# Altium PCB aircraftv2.PcbDoc
Units mil, origin at the board's own origin, x right, y up, seen from the top; angles counter-clockwise.
Board outline 6000 x 4000 mil, 2 copper layers (Top Layer, Bottom Layer); 58 components, 44 nets, 226 pads, 0 vias.
Unrouted connection lines stored in the file: 145.
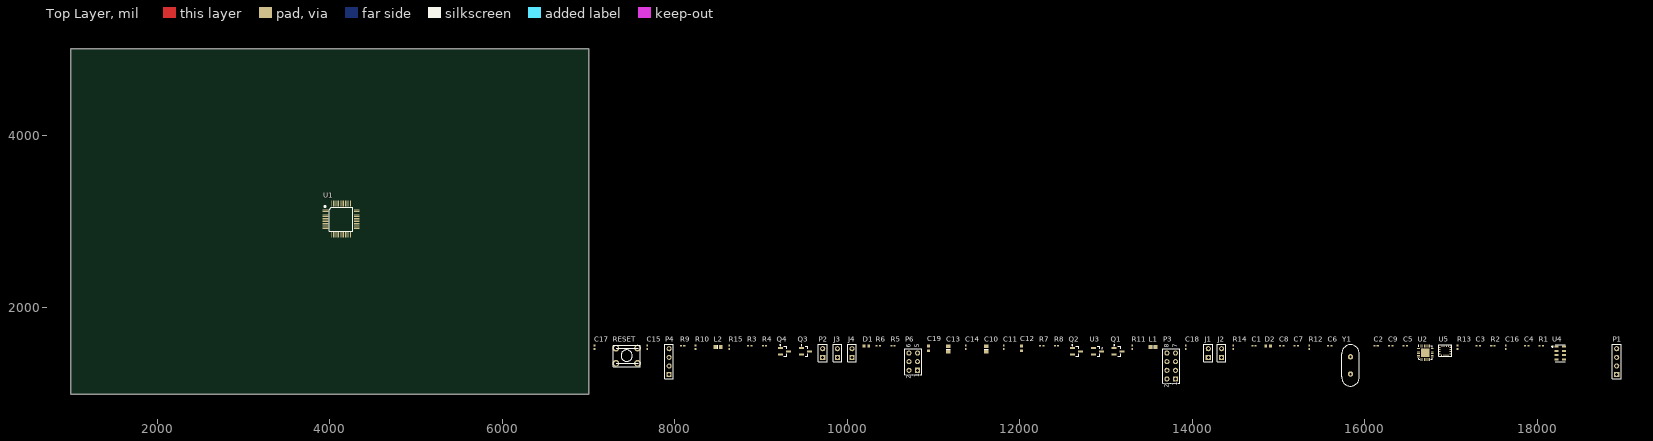
[diagram p0: Top Layer view]
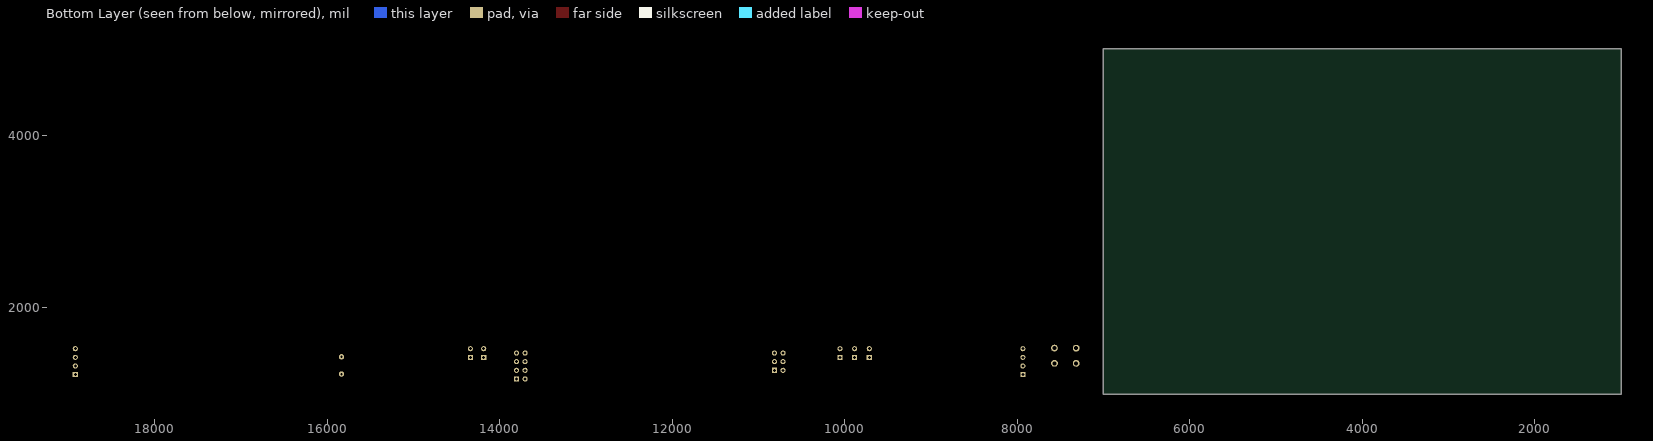
[diagram p1: Bottom Layer view, seen from below]

## Layer stack, top to bottom
Top Layer: signal copper 1.4
Dielectric: dielectric 12.6, FR-4, Dk 4.8
Bottom Layer: signal copper 1.4

## Board outline
1000,1000 7000,1000 7000,5000 1000,5000

## Design rules (kind name [scope] priority, off if disabled: settings)
Clearance [All] p1: gap=10
PolygonConnect [All] p1: connectstyle=Relief reliefconductorwidth=10 reliefentries=4 polygonreliefangle="90 Angle"
RoomDefinition aircraft [InComponentClass('aircraft')] p1: confinementstyle=ConfineIn formatcopy=TRUE lockcomponents=FALSE outline 7045,1060 18980,1060 18980,1685 7045,1685
RoutingVias [All] p1: holewidth=28 width=50 viastyle="Through Hole" minholewidth=28 minwidth=50 maxholewidth=28 maxwidth=50
SilkscreenOverComponentPads [All] p1: minsilkscreentomaskgap=10
SolderMaskExpansion [All] p1: expansion=4
Width [All] p1: maxlimit=10 minlimit=10 preferedwidth=10
27 further rules are at their usual default settings.

## Components (designator, comment, footprint, x,y, rotation, side; value= is the part's Value field where it differs from the comment)
C1 "Cap" 0402 14715,1560 r0 top
C2 "Cap" 0402 16130,1560 r0 top
C3 "Cap" 0402 17315,1560 r0 top
C4 "Cap" 0402 17875,1560 r0 top
C5 "Cap" 0402 16470,1560 r0 top
C6 "Cap" 0402 15595,1560 r0 top
C7 "Cap" 0402 15205,1560 r0 top
C8 "Cap" 0402 15035,1560 r0 top
C9 "Cap" 0402 16300,1560 r0 top
C10 "Cap" 6-0805_L 11610,1520 r90 top
C11 "Cap" 0402 11815,1540 r90 top
C12 "Cap" 1608[0603] 12020,1530 r90 top
C13 "Cap" 6-0805_L 11170,1520 r90 top
C14 "Cap" 0402 11375,1540 r90 top
C15 "Cap" 0402 7680,1540 r90 top
C16 "Cap" 0402 17635,1540 r90 top
C17 "Cap" 0402 7070,1540 r90 top
C18 "Cap" 0402 13925,1540 r90 top
C19 "Cap" 1608[0603] 10940,1530 r90 top
D1 "LED0" 1608[0603] 10220,1555 r0 top
D2 "LED0" 1608[0603] 14880,1555 r0 top
J1 "Header 2" HDR1X2 14185,1425 r90 top
J2 "Header 2" HDR1X2 14340,1425 r90 top
J3 "Header 2" HDR1X2 9885,1425 r90 top
J4 "Header 2" HDR1X2 10055,1425 r90 top
L1 "Inductor" 6-0805_L 13545,1545 r0 top
L2 "Inductor" 6-0805_L 8500,1545 r0 top
P1 "Header 4" HDR1X4 18920,1225 r90 top
P2 "Header 2" HDR1X2 9715,1425 r90 top
P3 "Header 4X2" HDR2X4 13805,1175 r90 top
P4 "Header 4" HDR1X4 7935,1225 r90 top
P6 "Header 3X2" HDR2X3 10815,1275 r90 top
Q1 "SI2302" SOT-23_M 13140,1495 r0 top
Q2 "SI2302" SOT-23_M 12655,1495 r0 top
Q3 "SI2302" SOT-23_M 9515,1495 r0 top
Q4 "SI2302" SOT-23_M 9270,1495 r0 top
R1 "Res3" 0402 18045,1560 r0 top
R2 "Res3" 0402 17485,1560 r0 top
R3 "Res3" 0402 8870,1560 r0 top
R4 "Res3" 0402 9040,1560 r0 top
R5 "Res3" 0402 10530,1560 r0 top
R6 "Res3" 0402 10360,1560 r0 top
R7 "Res3" 0402 12255,1560 r0 top
R8 "Res3" 0402 12425,1560 r0 top
R9 "Res3" 0402 8090,1560 r0 top
R10 "Res3" 0402 8240,1540 r90 top
R11 "Res3" 0402 13305,1540 r90 top
R12 "Res3" 0402 15355,1540 r90 top
R13 "Res3" 0402 17075,1540 r90 top
R14 "Res3" 0402 14475,1540 r90 top
R15 "Res3" 0402 8630,1540 r90 top
RESET "SW-PB" SW2 7445,1415 r0 top
U1 "STM32F103" LQFP48S 3950,3135 r0 top
U2 "MPU6050" QFN24 16780,1470 r0 top
U3 "ME6206A" SOT23_M 12900,1495 r0 top
U4 "MS5611" "MS5611 - duplicate" 18265,1475 r0 top
U5 "HWC5883L" HMC5883L 16935,1505 r0 top
Y1 "XTAL" XTAL2 15840,1340 r90 top

## Footprints (in the part's own frame and the unit in brackets; to place one, negate y for a bottom-side part, rotate by r counter-clockwise, add the part's x,y. Pads: shape width x height; smd on the part's side, far side on the other; paste and mask are expansions set on the pad)
6-0805_L [mm] "Chip Resistor, Body 2.0x1.2mm, IPC High Density"
  rect 1x1.3 smd: 1(-0.8,0) 2(0.8,0)
  silkscreen extent 0,-0.55 0,0.55, body extent -1.07,-0.7 1.07,0.7, height 0.7
0402 [mm] "Chip Capacitor, Body 1.0x0.5mm, IPC High Density"
  rect 0.6x0.5 smd: 1(-0.5,0) 2(0.5,0)
  body extent -0.55,-0.3 0.55,0.3, height 1.3
1608[0603] [mm] "Chip Capacitor, Body 1.6x0.8mm, IPC High Density"
  rect 0.8x0.9 smd: 1(-0.7,0) 2(0.7,0)
  body extent -0.87,-0.48 0.87,0.48, height 1.3
HDR1X2 [mm] "Connector; Header; 2 Position"
  rect 1.5x1.5 hole 0.9: 1(0,0)
  round 1.5 hole 0.9: 2(2.54,0)
  silkscreen extent -1.27,-1.27 3.81,1.27
HDR1X4 [mm] "Connector; Header; 4 Position"
  rect 1.5x1.5 hole 0.9: 1(0,0)
  round 1.5 hole 0.9: 2(2.54,0) 3(5.08,0) 4(7.62,0)
  silkscreen extent -1.27,-1.27 8.89,1.27
HDR2X3 [mm] "Connector; Header; 3x2 Position"
  rect 1.5x1.5 hole 0.9: 1(0,0)
  round 1.5 hole 0.9: 2(0,2.54) 3(2.54,0) 4(2.54,2.54) 5(5.08,0) 6(5.08,2.54)
  silkscreen extent -1.27,-1.27 6.35,3.81
HDR2X4 [mm] "Connector; Header; 4x2 Position"
  rect 1.5x1.5 hole 0.9: 1(0,0)
  round 1.5 hole 0.9: 2(0,2.54) 3(2.54,0) 4(2.54,2.54) 5(5.08,0) 6(5.08,2.54) 7(7.62,0) 8(7.62,2.54)
  silkscreen extent -1.27,-1.27 8.89,3.81
HMC5883L [mm]
  rect 0.45x0.3 smd: 1(1.397,0.889) 2(1.397,0.254) 3(1.397,-0.381) 4(1.397,-1.016) 9(-1.651,-1.016) 10(-1.651,-0.381) 11(-1.651,0.254) 12(-1.651,0.889)
  rect 0.3x0.45 smd: 5(0.762,-1.397) 6(0.127,-1.397) 7(-0.508,-1.397) 8(-1.143,-1.397) 13(-1.016,1.27) 14(-0.381,1.27) 15(0.254,1.27) 16(0.889,1.27)
  silkscreen extent -2.03,-1.78 1.78,1.65
LQFP48S [mil] "DPIN-0.5"
  rect 65x10 smd: 1(0.42,0.29) 2(0.42,-19.39) 3(0.42,-39.08) 4(0.42,-58.76) 5(0.42,-78.45) 6(0.42,-98.13) 7(0.42,-117.82) 8(0.42,-137.5) 9(0.42,-157.19) 10(0.42,-176.87) 11(0.42,-196.56) 12(0.42,-216.24) 25(362.63,-216.24) 26(362.63,-196.56) 27(362.63,-176.87) 28(362.63,-157.19) 29(362.63,-137.5) 30(362.63,-117.82) 31(362.63,-98.13) 32(362.63,-78.45) 33(362.63,-58.76) 34(362.63,-39.08) 35(362.63,-19.39) 36(362.63,0.29)
  rect 10x65 smd: 13(73.26,-289.08) 14(92.94,-289.08) 15(112.63,-289.08) 16(132.31,-289.08) 17(152,-289.08) 18(171.68,-289.08) 19(191.37,-289.08) 20(211.05,-289.08) 21(230.74,-289.08) 22(250.42,-289.08) 23(270.11,-289.08) 24(289.79,-289.08) 37(289.79,73.13) 38(270.11,73.13) 39(250.42,73.13) 40(230.74,73.13) 41(211.05,73.13) 42(191.37,73.13) 43(171.68,73.13) 44(152,73.13) 45(132.31,73.13) 46(112.63,73.13) 47(92.94,73.13) 48(73.26,73.13)
  silkscreen extent -10,-246 319,46
"MS5611 - duplicate" [mm]
  rect 1.1x0.6 smd: 1(-1.1,1.875) 2(-1.1,0.625) 3(-1.1,-0.625) 4(-1.1,-1.875) 5(1.1,-1.875) 6(1.1,-0.625) 7(1.1,0.625) 8(1.1,1.875)
  silkscreen extent -2.41,-2.5 1.5,2.5
QFN24 [mm] "QFN24"
  rect 0.8x0.25 smd: 1(-4,1.45) 2(-4,0.95) 3(-4,0.45) 4(-4,-0.05) 5(-4,-0.55) 6(-4,-1.05) 13(0,-1.05) 14(0,-0.55) 15(0,-0.05) 16(0,0.45) 17(0,0.95) 18(0,1.45)
  rect 0.25x0.8 smd: 7(-3.25,-1.8) 8(-2.75,-1.8) 9(-2.25,-1.8) 10(-1.75,-1.8) 11(-1.25,-1.8) 12(-0.75,-1.8) 19(-0.75,2.2) 20(-1.25,2.2) 21(-1.75,2.2) 22(-2.25,2.2) 23(-2.75,2.2) 24(-3.25,2.2)
  rect 2.5x2.5 smd: 25(-2,0.2)
  silkscreen extent -4.11,-1.75 0.05,2.36
SOT23_M [mm] "SOT23, 3-Leads, Body 2.9x1.3mm, Pitch 0.95mm, Lead Span 2.3mm - Reverse Pinning, IPC Low Density"
  rect 1.45x0.6 smd: 1(1.175,0) 2(-1.175,-0.95) 3(-1.175,0.95)
  silkscreen extent -0.1,-1.5 1.48,1.5, body extent -0.7,-1.5 0.7,1.5, height 1.1
SOT-23_M [mm] "SOT23, 3-Leads, Body 2.9x1.3mm, Pitch 0.95mm, Lead Span 2.5mm, IPC Low Density"
  rect 1.45x0.6 smd: 1(-1.175,0.95) 2(-1.175,-0.95) 3(1.175,0)
  silkscreen extent -1.3,-1.5 0.7,1.92, body extent -0.7,-1.5 0.7,1.5, height 1.1
SW2 [mm]
  round 2 hole 1.2: 1(-3.27,2.96) 2(3.14,2.98) 3(3.12,-1.5) 4(-3.27,-1.52)
  silkscreen extent -4.09,-2.5 3.98,3.88
XTAL2 [mil]
  round 62 hole 28: 1(91,6) 2(-109,6)
  silkscreen extent -249,-94 231,106

## Part data
C1 C2 C3 C4 C5 C6 C7 C8 C9 C10 C11 C12 C13 C14 C15 C16 C17 C18 C19: "Capacitor"
D1 D2: "Typical INFRARED GaAs LED"
J1 J2 J3 J4 P2: "Header, 2-Pin"
P1 P4: "Header, 4-Pin"
P3: "Header, 4-Pin, Dual row"
P6: "Header, 3-Pin, Dual row"
R1 R2 R3 R4 R5 R6 R7 R8 R9 R10 R11 R12 R13 R14 R15: "Resistor"
RESET: "Switc"
U5: library part HMC5883L
Y1: "Crystal Oscillator"

## Nets (pads, with @x,y where several pads share a name; then routed paths per layer and width w, separated by ;. In a path a pad name is that pad's centre, name@x,y a point inside that pad or via, vN(x,y) a via of type N, cw(c..) or ccw(c..) an arc to the next point about the centre after c; other vN are vias at no path point)
3V3: C2.2 C4.2 C8.2 C10.2 C11.1 C12.1 C16.2 C18.2 P1.1 P3.2 P4.2 P6.1 P6.2 R1.2 R2.2 R13.2 R15.2 U1.9 U1.24 U1.36 U1.48 U2.8 U2.13 U3.2 U4.1 U4.2 U5.2 U5.4 U5.13
AD: C15.2 R3.2 R4.1 U1.19
AUX_CL: U2.7 U5.1
AUX_DA: U2.6 U5.16
BOOT0: R5.2 U1.44
BOOT1: R6.1 U1.20
GND: C1.1 C2.1 C3.2 C4.1 C5.1 C6.1 C7.1 C8.1 C10.1 C11.2 C12.2 C13.1 C14.1 C15.1 C16.1 C17.2 C18.1 C19.1 D1.2 D2.2 L2.1 P1.2 P3.1 P4.4 P6.5 P6.6 Q1.2 Q2.2 Q3.2 Q4.2 R4.2 R7.1 R8.1 R9.1 R10.1 R14.1 RESET.2 U1.8 U1.23 U1.35 U1.47 U2.1 U2.11 U2.15 U2.17 U2.18 U3.1 U4.3 U4.4 U4.5 U5.9 U5.11
GND_BAT: L2.2 P2.1
HW_INT: R13.1 U5.15
INT: U2.12
LED1: R12.1 U1.38
MISO: P3.7 U1.16
MOSI: P3.6 U1.17
NetC1_2: C1.2 U2.10
NetC3_1: C3.1 U2.20
NetC5_2: C5.2 U1.5 Y1.2
NetC6_2: C6.2 U1.6 Y1.1
NetC7_2: C7.2 U5.10
NetC9_1: C9.1 U5.12
NetC9_2: C9.2 U5.8
NetD1_1: D1.1 R11.2
NetD2_1: D2.1 R12.2
NetJ1_1: J1.1 Q1.3
NetJ2_2: J2.2 Q2.3
NetJ3_1: J3.1 Q3.3
NetJ4_2: J4.2 Q4.3
NetP6_3: P6.3 R5.1
NetP6_4: P6.4 R6.2
NetR14_2: R14.2 U2.9
NRST: C17.1 R15.1 RESET.1 U1.7
PWM1: Q1.1 R7.2 U1.10
PWM2: Q2.1 R8.2 U1.11
PWM3: Q3.1 R9.2 U1.29
PWM4: Q4.1 R10.2 U1.32
RXD: P1.4 U1.31
SCL: R1.1 U1.21 U2.23 U4.8
SDA: R2.1 U1.22 U2.24 U4.7
TXD: P1.3 U1.30
VCC: C13.2 C14.2 C19.2 L1.1 P4.1 R3.1 R11.1 U3.3
VCC_BAT: J1.2 J2.1 J3.2 J4.1 L1.2 P2.2 P4.3
W_CE: P3.3 U1.41
W_CSN: P3.4 U1.14
W_IRQ: P3.8 U1.18
W_SCK: P3.5 U1.15
pads on no net: RESET.3 RESET.4 U1.1 U1.2 U1.3 U1.4 U1.12 U1.13 U1.25 U1.26 U1.27 U1.28 U1.33 U1.34 U1.37 U1.39 U1.40 U1.42 U1.43 U1.45 U1.46 U2.2 U2.3 U2.4 U2.5 U2.14 U2.16 U2.19 U2.21 U2.22 U2.25 U4.6 U5.3 U5.5 U5.6 U5.7 U5.14

## Text inside footprints (layer, text, board x,y; h text height)
P3: Top Overlay "2" at 13725,1075 h50 r90; Top Overlay "1" at 13825,1095 h50 r90; Top Overlay "7" at 13825,1535 h50 r90; Top Overlay "8" at 13725,1535 h50 r90
P6: Top Overlay "6" at 10735,1535 h50 r90; Top Overlay "5" at 10835,1535 h50 r90; Top Overlay "2" at 10735,1175 h50 r90; Top Overlay "1" at 10835,1195 h50 r90